# Allegro board PRISON_GOD_SCH_V131_4layer.brd
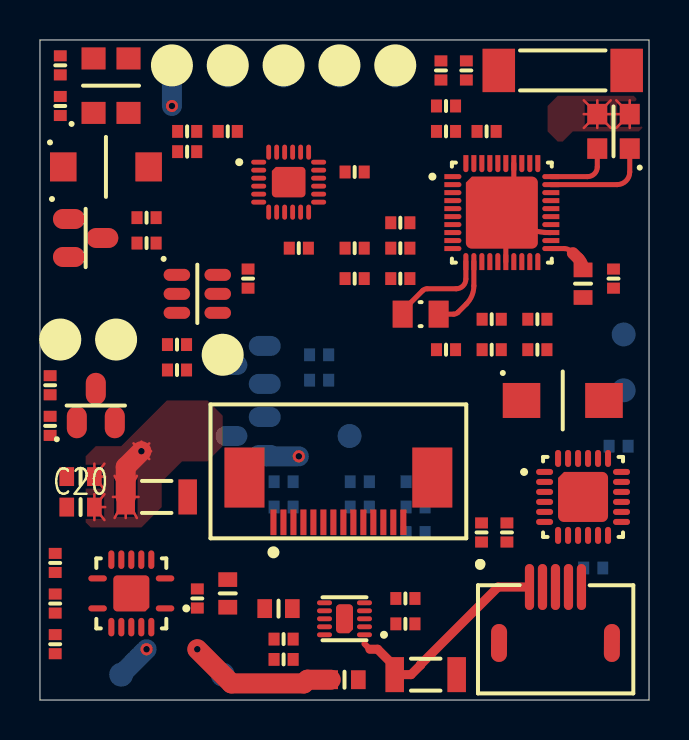
[diagram p0: board, top side]
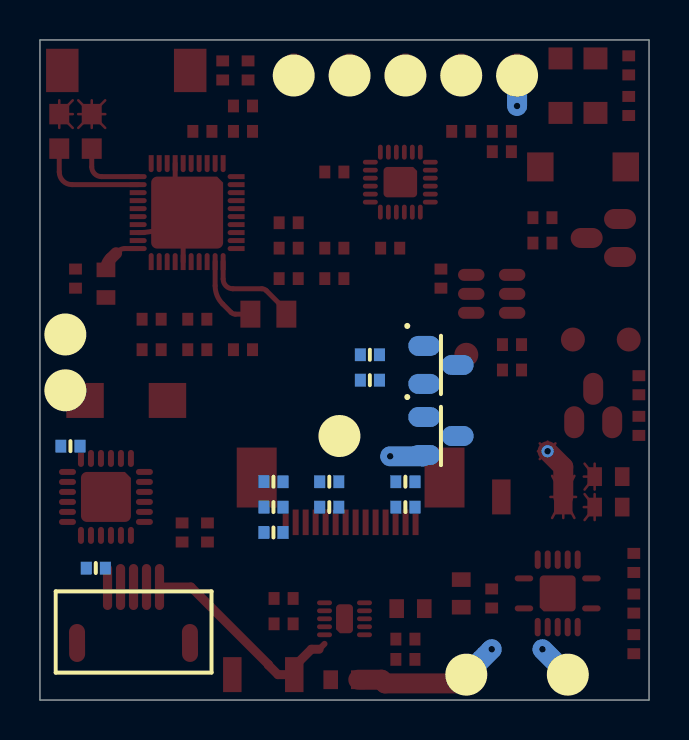
[diagram p1: board, bottom side, seen from below]

Outline 30.48 x 33.02 mm; copper layers: TOP, POWER SOURCE, GND, BOTTOM. Coordinates in mm from the lower left corner of the outline.
Outline path: 0,33.02 30.48,33.02 30.48,0 0,0 0,33.02

## Design rules (mm)
constraint set DEFAULT: min track width 0.127

## Placement (name value [footprint] x y rotation side)
ANT  ANTENNA  [ANT700X200-2N]  26.16 31.5 0 top
BAT+  BAT+  [TESTPOINT120]  9.14 1.27 180 bottom
BAT-  BAT-  [TESTPOINT120]  4.06 1.27 180 bottom
C1  100n  [RESC_0402]  7.37 28.45 0 top
C2  2.2p  [RESC_0402]  20.32 29.72 180 top
C3  100n  [RESC_0402]  22.35 28.45 0 top
C4  1.0u  [RESC_0402]  28.7 21.08 90 top
C5  1.0u  [RESC_0402]  24.89 19.05 180 top
C6  100n  [RESC_0402]  24.89 17.53 0 top
C7  1.0u  [RESC_0402]  22.61 19.05 0 top
C8  100n  [RESC_0402]  20.32 17.53 0 top
C9  100n  [RESC_0402]  18.03 23.88 0 top
C10  0-75p  [RESC_0402]  6.86 17.78 0 top
C11  100n  [RESC_0402]  10.41 21.08 270 top
C12  1u  [RESC_0402]  12.19 10.92 180 bottom
C13  4.7u  [RESC_0402]  18.8 10.92 180 bottom
C14  1u  [RESC_0402]  12.19 9.65 180 bottom
C15  2.2u  [RESC_0402]  18.8 9.65 180 bottom
C16  4.7u  [RESC_0402]  16 9.65 180 bottom
C17  1u  [RESC_0603]  15.24 1.02 0 top
C18  4.7u  [RESC_0603]  9.4 5.33 90 top
C19  0.1u  [RESC_0402]  7.87 5.08 90 top
C20  10u  [RESC_0603]  2.03 9.65 0 top
C21  10u  [RESC_0603]  2.03 11.18 0 top
C22  100n  [RESC_0402]  12.95 22.61 0 top
C23  10UF  [RESC_1206]  19.3 1.27 180 top
C24  4.7u  [RESC_0402]  28.96 12.7 0 bottom
C25  100n  [RESC_0402]  23.37 8.38 270 top
C26  100n  [RESC_0402]  22.1 8.38 270 top
C27  1.0u  [RESC_0402]  27.69 6.6 180 bottom
C28  100n  [RESC_0402]  15.75 26.42 0 top
CHR_LED  LED  [RESC_0603]  11.94 4.57 180 top
DA_RES  BUTTON  [BUTTON300X400X200-2N]  26.16 14.99 0 top
INTA  INTA  [TESTPOINT120]  29.21 15.49 180 bottom
INTB  INTB  [TESTPOINT120]  29.21 18.29 180 bottom
INTC  INTC  [TESTPOINT120]  17.78 31.75 0 top
INTD  INTD  [TESTPOINT120]  14.99 31.75 0 top
J_GND  GND  [TESTPOINT120]  9.4 31.24 180 bottom
J_VCC  J_VCC  [TESTPOINT120]  6.6 31.24 180 bottom
L1  DNP  [RESC_0402]  21.34 31.5 90 top
L2  7.5n  [RESC_0402]  20.07 31.5 90 top
L3  3.9n  [RESC_0402]  20.32 28.45 0 top
L4  2.2u  [RESC_0603]  27.18 20.83 270 top
L5  4.7u  [RESC_1206]  5.84 10.16 180 top
LED  RED_GREEN  [RGB_COM_A_3528-4N]  3.56 30.73 90 top
PAD  PAD  [TESTPOINT120]  9.14 17.27 0 top
Q1  SI2302DS  [SOT95P237X112-3N]  2.29 23.11 0 top
Q2  SI2302DS  [SOT95P237X112-3N]  2.79 14.73 90 top
Q3  Si2301BDS  [SOT95P237X112-3N]  10.41 13.21 180 bottom
Q4  SI2302DS  [SOT95P237X112-3N]  10.41 16.76 180 bottom
R1  10k  [RESC_0402]  9.4 28.45 0 top
R2  10k  [RESC_0402]  7.37 27.43 180 top
R3  10k  [RESC_0402]  18.03 22.61 0 top
R4  10k  [RESC_0402]  18.03 21.08 0 top
R5  10k  [RESC_0402]  15.75 22.61 0 top
R6  10k  [RESC_0402]  15.75 21.08 0 top
R7  10k  [RESC_0402]  22.61 17.53 0 top
R8  100  [RESC_0402]  5.33 22.86 180 top
R9  100  [RESC_0402]  0.51 15.75 270 top
R10  100  [RESC_0402]  1.02 31.75 90 top
R11  100  [RESC_0402]  1.02 29.72 90 top
R12  100  [RESC_0402]  5.33 24.13 180 top
R13  100  [RESC_0402]  0.51 13.72 270 top
R14  1-10k  [RESC_0402]  6.86 16.51 180 top
R15  47k  [RESC_0402]  13.97 17.27 180 bottom
R16  47k  [RESC_0402]  13.97 16 180 bottom
R17  10k  [RESC_0402]  16 10.92 180 bottom
R18  560k  [RESC_0402]  18.8 8.38 180 bottom
R19  500  [RESC_0402]  18.29 3.81 0 top
R20  250  [RESC_0402]  18.29 5.08 0 top
R21  10k  [RESC_0402]  12.19 2.03 180 top
R22  1.5k  [RESC_0402]  12.19 3.05 0 top
R23  158k  [RESC_0402]  0.76 2.79 90 top
R24  90k  [RESC_0402]  0.76 6.86 90 top
R25  15k  [RESC_0402]  0.76 4.83 90 top
RES  RES  [TESTPOINT120]  15.49 13.21 180 bottom
RXD  RX  [TESTPOINT120]  9.4 31.75 0 top
SOUNDER  R  [DET402_450X300-2N]  3.3 26.67 0 top
SWCLK  SWCLK  [TESTPOINT120]  14.99 31.24 180 bottom
SWDIO  SWDIO  [TESTPOINT120]  12.19 31.24 180 bottom
TXD  TX  [TESTPOINT120]  12.19 31.75 0 top
U1  DA14583_QFN40  [QFN40P500X500X80-41N]  23.11 24.38 0 top
U2  ASC0111B  [SOT95P237X292-6N]  7.87 20.32 0 top
U3  OLED_DIS_64_32  [FPC14N_1280X670X200-16N]  11.68 8.89 180 top
U4  BQ24050  [SON40P200X200X80-11N]  15.24 4.06 180 top
U5  TPS62736_PVQFN14  [QFN14P350X350X80-15N]  4.57 5.33 180 top
U6  MPU9250  [QFN24P300X300X100-25N]  12.45 25.91 0 top
U7  CP2104_QFN24  [QFN24P400X400X80-25N]  27.18 10.16 0 top
U_GND  GND  [TESTPOINT120]  6.6 31.75 0 top
USB  MICRO USB  [MICROUSB]  22.1 0.25 0 top
VM+  VM+  [TESTPOINT120]  3.81 18.03 0 top
VM-  VM-  [TESTPOINT120]  1.02 18.03 0 top
VPP  VPP  [TESTPOINT120]  17.78 31.24 180 bottom
Y1  16MHZ  [OSCCC200X250X90-4N]  28.7 28.45 180 top
Y2  32KHZ  [OSCCC200X120X60-2N]  19.05 19.3 0 top

## Library data of the parts
ANT = ANTENNA_0
BAT+ BAT- INTA INTB INTC INTD J_GND J_VCC PAD RES RXD SWCLK SWDIO TXD U_GND VM+ VM- VPP = TEST POINT
C1-C22 C24-C28 = CAP NP
C23 = CAP
CHR_LED = LED
DA_RES = SW PUSHBUTTON
L1-L5 = INDUCTOR
LED = LED BI-COLOUR_0
Q1 Q2 Q4 = MOSFET_I_EN_GSD: room: motor
Q3 = Si2301BDS_0
R1-R25 SOUNDER = R
U1 = DA14583_QFN40
U2 = ASC0111B_0
U3 = OLED_DIS_64_0
U4 = BQ24050
U5 = TPS62736_PVQFN14_2
U6 = MPU9250_1
U7 = CP2104_QFN24_0
USB = MICROUSB_1
Y1 = CRYSTAL14
Y2 = CRYSTAL

## Footprints (pads in the part's own frame, mm; a bottom-side part is the same pattern mirrored in y, then rotated)
ANT700X200-2N
  rect 1.625x2.17 smd: 1(-3.2,0) 2(3.2,0)
BUTTON300X400X200-2N
  rect 1.875x1.75 smd: 1(-2.062,0) 2(2.062,0)
DET402_450X300-2N
  rect 1.325x1.45 smd: 1(-2.138,0) 2(2.138,0)
FPC14N_1280X670X200-16N
  rect 0.3x1.28 smd: 1(0,0) 2(-0.5,0) 3(-1,0) 4(-1.5,0) 5(-2,0) 6(-2.5,0) 7(-3,0) 8(-3.5,0) 9(-4,0) 10(-4.5,0) 11(-5,0) 12(-5.5,0) 13(-6,0) 14(-6.5,0)
  rect 2x3 smd: M1(-7.95,-2.24) M2(1.45,-2.24)
MICROUSB
  round 0 hole 0.6: (1.7,4.5) (5.7,4.5)
  oval 0.46x2.3 smd: 1(2.4,5.4) 2(3.05,5.4) 3(3.7,5.4) 4(4.35,5.4) 5(5,5.4)
  oval 1.9x0.8 smd rot 89.7: 6(6.525,2.6) 7(0.875,2.6)
OSCCC200X120X60-2N
  rect 1x1.35 smd: 1(-0.9,0) 2(0.9,0)
OSCCC200X250X90-4N
  rect 1x1.025 smd: 1(-0.812,0.863) 2(-0.812,-0.863) 3(0.812,-0.863) 4(0.812,0.863)
QFN14P350X350X80-15N
  oval 0.925x0.3 smd: 1(-1.688,0.75) 7(1.688,0.75) 8(1.688,-0.75) 14(-1.688,-0.75)
  oval 0.3x0.925 smd: 2(-1,1.688) 3(-0.5,1.688) 4(0,1.688) 5(0.5,1.688) 6(1,1.688) 9(1,-1.688) 10(0.5,-1.688) 11(0,-1.688) 12(-0.5,-1.688) 13(-1,-1.688)
  custom 1.8x1.8 smd: 15(0,0)
QFN24P300X300X100-25N
  oval 0.75x0.238 smd: 1(-1.5,1) 2(-1.5,0.6) 3(-1.5,0.2) 4(-1.5,-0.2) 5(-1.5,-0.6) 6(-1.5,-1) 13(1.5,-1) 14(1.5,-0.6) 15(1.5,-0.2) 16(1.5,0.2) 17(1.5,0.6) 18(1.5,1)
  oval 0.238x0.75 smd: 7(-1,-1.5) 8(-0.6,-1.5) 9(-0.2,-1.5) 10(0.2,-1.5) 11(0.6,-1.5) 12(1,-1.5) 19(1,1.5) 20(0.6,1.5) 21(0.2,1.5) 22(-0.2,1.5) 23(-0.6,1.5) 24(-1,1.5)
  custom 1.68x1.52 smd: 25(0,0)
QFN24P400X400X80-25N
  oval 0.85x0.3 smd: 1(-1.925,1.25) 2(-1.925,0.75) 3(-1.925,0.25) 4(-1.925,-0.25) 5(-1.925,-0.75) 6(-1.925,-1.25) 13(1.925,-1.25) 14(1.925,-0.75) 15(1.925,-0.25) 16(1.925,0.25) 17(1.925,0.75) 18(1.925,1.25)
  oval 0.3x0.85 smd: 7(-1.25,-1.925) 8(-0.75,-1.925) 9(-0.25,-1.925) 10(0.25,-1.925) 11(0.75,-1.925) 12(1.25,-1.925) 19(1.25,1.925) 20(0.75,1.925) 21(0.25,1.925) 22(-0.25,1.925) 23(-0.75,1.925) 24(-1.25,1.925)
  custom 2.5x2.5 smd: 25(0,0)
QFN40P500X500X80-41N
  custom 0.85x0.25 smd: 1(-2.45,1.8) 2(-2.45,1.4) 3(-2.45,1) 4(-2.45,0.6) 5(-2.45,0.2) 6(-2.45,-0.2) 7(-2.45,-0.6) 8(-2.45,-1) 9(-2.45,-1.4) 10(-2.45,-1.8) 21(2.45,-1.8) 22(2.45,-1.4) 23(2.45,-1) 24(2.45,-0.6) 25(2.45,-0.2) 26(2.45,0.2) 27(2.45,0.6) 28(2.45,1) 29(2.45,1.4) 30(2.45,1.8)
  custom 0.25x0.85 smd: 11(-1.8,-2.45) 12(-1.4,-2.45) 13(-1,-2.45) 14(-0.6,-2.45) 15(-0.2,-2.45) 16(0.2,-2.45) 17(0.6,-2.45) 18(1,-2.45) 19(1.4,-2.45) 20(1.8,-2.45) 31(1.8,2.45) 32(1.4,2.45) 33(1,2.45) 34(0.6,2.45) 35(0.2,2.45) 36(-0.2,2.45) 37(-0.6,2.45) 38(-1,2.45) 39(-1.4,2.45) 40(-1.8,2.45)
  custom 3.6x3.6 smd: 41(0,0)
RESC_0402
  rect 0.55x0.64 smd: 1(-0.477,0) 2(0.477,0)
RESC_0603
  rect 0.73x0.94 smd: 1(-0.69,0) 2(0.69,0)
RESC_1206
  rect 0.925x1.75 smd: 1(-1.55,0) 2(1.55,0)
RGB_COM_A_3528-4N
  rect 1.1x1.2 smd: 1(-1.363,0.875) 2(-1.363,-0.875) 3(1.363,-0.875) 4(1.363,0.875)
SON40P200X200X80-11N
  oval 0.75x0.24 smd: 1(-1,0.8) 2(-1,0.4) 3(-1,0) 4(-1,-0.4) 5(-1,-0.8) 6(1,-0.8) 7(1,-0.4) 8(1,0) 9(1,0.4) 10(1,0.8)
  custom 0.85x1.45 smd: 11(0,0)
SOT95P237X112-3N
  oval 1.6x1 smd: 1(-0.835,0.95) 2(-0.835,-0.95) 3(0.835,0)
SOT95P237X292-6N
  oval 1.325x0.6 smd: 1(-1.022,0.95) 2(-1.022,0) 3(-1.022,-0.95) 4(1.022,-0.95) 5(1.022,0) 6(1.022,0.95)
TESTPOINT120
  round 1.2 smd: 1(0,0)

## Nets
GND: BAT-.1 C1.1 C3.2 C4.2 C5.1 C6.2 C7.2 C8.2 C9.2 C10.2 C11.1 C13.1 C15.1 C16.2 C17.2 C18.2 C19.2 C20.1 C21.1 C22.2 C23.1 C24.1 C25.1 C26.1 C27.1 C28.1 DA_RES.2 J_GND.1 L1.2 L2.2 L3.2 Q1.2(S) Q2.2(S) Q4.2(S) R1.2 R7.2 R16.1 R18.1 R19.1 R20.2 R21.2 R24.2 U1.16 U1.23 U1.34 U1.41 U2.2 U2.4 U2.6 U3.7(VSS) U4.3(VSS) U4.11 U5.2 U5.3 U5.4 U5.5 U5.12(VSS) U5.14 U5.15 U6.18 U6.20 U6.25 U7.2 U7.25 U_GND.1 USB.5 USB.6 USB.7 Y1.2 Y1.3
VBAT: BAT+.1 C17.1 C18.1 C19.1 J_VCC.1 Q3.2(S) R2.1 R15.1 R22.2 SOUNDER.1 U4.10 U5.1 VM+.1
VBAT_AD: C1.2 R1.1 R2.2 U1.1
VBUS: C23.2 C27.2 U4.1 U7.7 U7.8 USB.1(VBUS)
VCC_3V: C6.1 C7.1 C8.1 C9.1 C11.2 C16.1 C20.2 C21.2 C25.2 C28.2 DA_RES.1 L5.2 LED.3 LED.4 R3.2 R4.2 R5.1 R6.1 R17.1 U1.5 U1.14 U1.15 U2.5(VDD) U3.8 U5.11 U6.1 U6.8(VDDIO) U6.9 U6.13 U6.22 U7.5 U7.9
VIN_OK: U1.22 U5.10
VIN_OK_SET: U1.24 U5.6
CHR_SET: U1.13 U4.7
D+: U4.5 U7.3 USB.3
D-: U4.6 U7.4 USB.2
DA_RST: R7.1 U1.17
I2C_SCL_1: R4.1 U1.9 U3.11
I2C_SCL_2: R5.2 U1.6 U6.23
I2C_SDA_1: R3.1 U1.10 U3.10
I2C_SDA_2: R6.2 U1.7 U6.24
INTA: INTA.1 U1.18
INTB: INTB.1 U1.20
INTC: INTC.1 U1.39
INTD: INTD.1 U1.40
LED1: R10.2 U1.33
LED2: R11.2 U1.36
MOTOR: R13.1 U1.2
MPU_FSYNC: U1.37 U6.11
MPU_INT: U1.8 U6.12
OLED_RES: R17.2 RES.1 U3.9
OLED_VBAT: Q3.3 U3.5
OLED_VBAT_SW: Q4.1 R16.2 U1.28
SOUNDER: R12.1 U1.32
SWCLK: SWCLK.1 U1.26
SWDIO: SWDIO.1 U1.25
TOUCH: U1.27 U2.1
UART_RX: RXD.1 U1.4 U7.21
UART_TX: TXD.1 U1.3 U7.20
VDCDC: C3.1 C4.1 C5.2 L4.2 U1.19 U1.31
VPP: U1.38 VPP.1
N650552: C2.2 L2.1 L3.1 U1.35
N650846: L4.1 U1.21
N657737: U1.11 Y2.1
N657743: U1.12(XTAL32KP) Y2.2
N658494: U1.29 Y1.1
N680797: ANT.1 C2.1 L1.1
N748992: R19.2 U4.2
N749044: R20.1 U4.4
N749072: R21.1 U4.9
N749104: CHR_LED.1(CATHODE) U4.8
N749108: CHR_LED.2 R22.1
N749358: L5.1 U5.13
N749416: R24.1 R25.2 U5.8
N749488: R23.2 R25.1 U5.9
N750591: C22.1 U6.10
N751124: R8.1 SOUNDER.2
N751136: R9.1 VM-.1
N751236: Q1.3 R8.2
N751248: Q2.3 R9.2
N751256: Q1.1 R12.2
N751260: Q2.1 R13.2
N752175: C12.2 U3.1
N752329: Q3.1 Q4.3 R15.2
N752341: C12.1 U3.2
N752385: C14.2 U3.3
N752391: C14.1 U3.4
N752429: R18.2 U3.12
N752435: C15.2 U3.13
N752441: C13.2 U3.14
N753230: LED.1 R10.1
N753234: LED.2(YG_C) R11.1
N753932: C24.2 U7.16(VPP)
N754493: C10.1 R14.2 U2.3
N766501: PAD.1 R14.1
N768010: C26.2 U7.6
N788503: U1.30 Y1.4
N7492626: R23.1 U5.7

Pads without a net: ANT 2; U3 6 M1 M2; U6 2 3 4 5 6 7 14 15 16 17 19 21; U7 1 10 11 12 13 14 15 17 18 19 22 23 24; USB 4

## Via types
v1: diameter 0.61, hole 0.33, TOP to BOTTOM, 5 vias

## Routing (per net, layer and track width the routed paths; a pad name or vN(x,y) marks a point on that pad's centre or on a via; arc(x,y) is an arc through that point)
GND: length 160.3
  TOP w0.127: Y1.2 29.51,30 ; Y1.2 28.84,29.31 ; Y1.2 28.84,28.62 ; Y1.2 28.84,30 ; Y1.2 29.51,28.62 ; Y1.3 28.57,29.31 ; Y1.3 27.22,28.62 ; Y1.3 27.22,30 ; Y1.3 27.89,28.62 ; Y1.3 28.56,30 ; Y1.3 27.89,30 ; Y1.3 27.21,29.31 ; Y1.3 28.56,28.62
  TOP w0.25: U1.16 23.31,23.9 arc(23.26,24.16) U1.41 ; U1.34 23.71,25.83 arc(23.56,25.05) U1.41 ; U1.23 25.53,23.38 arc(24.22,23.64) U1.41
  GND w0.127: v1(5.33,2.54) 5.73,2.93 ; v1(5.33,2.54) 5.33,2.06 ; v1(5.33,2.54) 5.73,2.15 ; v1(5.33,2.54) 4.94,2.15 ; v1(5.33,2.54) 4.94,2.93 ; v1(5.33,2.54) 4.85,2.54
  GND w1: 5.33,5.1 v1(5.33,2.54) 6.56,2.54 8.84,4.83 16.51,4.83 19.81,1.52 ; 5.33,5.1 4.33,6.1 2.79,6.1 1.52,7.37 1.52,11.94 3.56,13.97 3.56,20.07 1.27,22.35 1.27,24.38 5.08,28.19 7.13,28.19 ; 5.33,5.1 5.33,5.33 ; 5.33,5.33 8.13,8.13 13.72,8.13 16.51,10.92 26.42,10.92 27.43,9.91 27.43,6.86 25.4,4.83 ; 5.33,5.33 5.33,9.14 8.13,11.94 8.13,21.34 13.97,27.18 18.03,27.18 20.32,29.46 23.88,29.46 25.15,28.19 27.94,28.19 28.96,27.18 28.96,21.08 28.45,20.57 28.45,15.24 27.69,14.48
  BOTTOM w1: BAT-.1 v1(5.33,2.54)
VBAT: length 73
  TOP w1: C17.1 13.39,1.02 13.2,0.83 9.58,0.83 v1(7.87,2.54)
  POWER SOURCE w0.127: v1(6.6,29.72) 7,30.11 ; v1(6.6,29.72) 7.09,29.72 ; v1(6.6,29.72) 6.6,29.24 ; v1(6.6,29.72) 6.21,29.33 ; v1(6.6,29.72) 7,29.33 ; v1(6.6,29.72) 6.6,30.2 ; v1(6.6,29.72) 6.21,30.11 ; 7.39,2.54 v1(7.87,2.54) ; v1(7.87,2.54) 8.27,2.15 ; v1(7.87,2.54) 7.48,2.93 ; v1(7.87,2.54) 7.87,2.06 ; v1(7.87,2.54) 7.48,2.15 ; v1(7.87,2.54) 8.27,2.93 ; v1(7.87,2.54) 7.87,3.02 ; v1(7.87,2.54) 8.36,2.54 ; v1(12.95,12.19) 13.35,11.8 ; v1(12.95,12.19) 12.56,12.58 ; v1(12.95,12.19) 12.56,11.8 ; v1(12.95,12.19) 12.95,12.67 ; v1(12.95,12.19) 12.47,12.19 ; v1(12.95,12.19) 13.35,12.58 ; v1(12.95,12.19) 13.44,12.19
  POWER SOURCE w1: 9.4,7.11 9.4,4.06 v1(7.87,2.54) ; 9.4,7.11 8.38,8.13 1.78,8.13 1.07,8.84 1.07,15.29 4.83,19.05 4.83,22.86 1.22,26.47 1.22,27.89 3.05,29.72 v1(6.6,29.72) ; 9.4,7.11 12.95,10.67 v1(12.95,12.19)
  BOTTOM w1: v1(12.95,12.19) 11.31,12.19 Q3.2 ; BAT+.1 v1(7.87,2.54) ; v1(6.6,29.72) J_VCC.1
VBUS: length 11
  TOP w0.3: 16.24,2.81 16.51,2.54
  TOP w0.45: 16.51,2.54 16.9,2.54 17.75,1.68 C23.2 18.57,1.27 19.05,1.75 19.05,1.78 22.93,5.65 USB.1
VCC_3V: length 63.4
  TOP w0.127: v1(5.08,12.45) 5.47,12.84 ; v1(5.08,12.45) 5.08,12.93 ; v1(5.08,12.45) 5.08,11.96 ; v1(5.08,12.45) 5.56,12.45 ; v1(5.08,12.45) 4.68,12.84 ; v1(5.08,12.45) 4.59,12.45 ; v1(5.08,12.45) 5.47,12.05 ; L5.2 4.85,9.11 ; L5.2 3.74,9.11 ; L5.2 3.74,11.21 ; L5.2 4.93,10.16 ; L5.2 4.29,9.11 ; L5.2 4.85,11.21 ; L5.2 3.65,10.16 ; 2.72,10.53 C21.2 ; C21.2 2.72,11.82 ; C21.2 3.23,11.82 ; C21.2 3.23,10.53 ; C21.2 3.27,11.18 ; C20.2 3.23,10.3 ; C20.2 3.27,9.65 ; C20.2 2.72,9 ; C20.2 3.23,9 ; C20.2 2.72,10.3
  TOP w1: L5.2 4.29,11.66 v1(5.08,12.45)
  POWER SOURCE w0.127: 4.59,12.45 v1(5.08,12.45) ; v1(5.08,12.45) 5.47,12.05 ; v1(5.08,12.45) 5.47,12.84 ; v1(5.08,12.45) 4.68,12.84 ; v1(5.08,12.45) 5.56,12.45 ; v1(5.08,12.45) 4.68,12.05 ; v1(5.08,12.45) 5.08,11.96
  POWER SOURCE w1: 23.11,7.87 23.11,11.18 25.65,13.72 25.65,16.78 24.65,17.78 22.86,17.78 17.27,23.37 13.21,23.37 5.08,15.24 v1(5.08,12.45)
N650846: length 2.2
  TOP w0.25: 26.67,22.35 26.58,22.44 arc(26.42,22.55) 26.24,22.58 U1.21
  TOP w0.6: 26.67,22.35 26.95,22.07 arc(27.12,21.82) L4.1
N657737: length 4.9
  TOP w0.25: U1.11 21.31,21.06 arc(21.17,20.72) 20.83,20.57 19.38,20.57 arc(19.26,20.55) 19.15,20.48 18.22,19.55 arc(18.17,19.47) 18.15,19.38 Y2.1
N657743: length 3.8
  TOP w0.25: Y2.2 20.7,19.3 arc(20.82,19.33) 20.92,19.39 21.34,19.81 arc(21.62,20.23) 21.71,20.72 U1.12
N658494: length 5.5
  TOP w0.25: U1.29 28.88,25.78 arc(29.33,25.97) 29.51,26.42 Y1.1
N788503: length 3.5
  TOP w0.25: U1.30 27.4,26.18 arc(27.75,26.33) 27.89,26.67 Y1.4

## Copper pours and planes (outline as drawn; the poured copper is in the pictures)
GND on TOP: 25.91,30.23 29.72,30.23 30.23,29.72 30.23,28.7 29.97,28.45 26.67,28.45 26.16,27.94 25.91,27.94 25.4,28.45 25.4,29.72
GND on GND: 19.81,28.96 12.7,28.96 7.11,23.37 7.11,12.45 3.56,8.89 3.56,5.33 4.32,5.33 9.91,10.92 9.91,21.84 13.97,25.91 17.27,25.91 19.81,28.45
GND on GND: 16.76,27.43 16.76,17.78 17.78,16.76 22.1,16.76 22.86,16 22.86,14.48 23.62,13.72 29.46,13.72 30.23,14.73 30.23,25.91 29.72,26.42 27.37,26.42 26.92,27.01 26.92,29.72 26.42,30.23 22.1,30.23 21.84,30.48 21.84,32.51 21.59,32.77 19.81,32.77 19.3,32.26 19.3,29.97 ; 1 cut-out
GND on GND: 10.67,30.23 5.59,30.23 4.32,31.5 4.32,32.51 4.06,32.77 0.76,32.77 0.25,32.26 0.25,7.37 3.56,4.06 4.06,4.06 5.84,5.84 5.84,8.64 5.59,8.89 3.3,8.89 3.05,9.14 3.05,11.43 5.08,13.46 5.08,24.38 5.84,25.15 6.86,25.15 10.92,29.21 10.92,29.97
GND on GND: 16.76,12.95 29.46,12.95 29.97,12.45 29.97,1.27 28.96,0.25 2.03,0.25 1.02,1.27 1.02,2.79 7.87,9.65 13.46,9.65
VBAT on POWER SOURCE: 0.76,32.77 8.13,32.77 9.65,31.24 9.65,27.69 6.6,24.64 6.6,18.54 3.56,15.49 3.56,10.92 5.08,9.4 8.89,9.4 9.91,10.41 9.91,12.95 10.67,13.72 13.46,13.72 14.99,12.19 14.99,9.91 11.94,6.86 10.92,6.86 10.41,6.35 10.41,3.05 11.68,1.78 14.48,1.78 15.24,1.02 15.24,0.51 14.99,0.25 8.38,0.25 5.59,3.05 5.59,5.08 5.08,5.59 1.52,5.59 0.25,6.86 0.25,32.26
VCC_3V on TOP: 2.79,12.7 2.29,12.19 2.29,8.89 2.54,8.64 5.08,8.64 6.1,9.65 6.1,10.92 7.11,11.94 8.38,11.94 9.14,12.7 9.14,14.22 8.38,14.99 6.35,14.99 4.06,12.7
VCC_3V on POWER SOURCE: 4.32,15.24 4.32,11.43 5.59,10.16 8.38,10.16 9.14,10.92 9.14,16.51 13.97,21.34 17.27,21.34 22.61,16 22.61,13.72 18.03,9.14 18.03,7.37 19.81,5.59 22.1,5.59 24.38,7.87 24.38,10.41 27.43,13.46 27.43,17.27 20.32,24.38 20.32,28.45 19.81,28.96 12.7,28.96 7.87,24.38 7.87,18.8
